# Altium PCB Board.PcbDoc
Units mm, origin at the board's own origin, x right, y up, seen from the top; angles counter-clockwise.
Board outline 80 x 50 mm, 4 copper layers (Top Layer, Internal Plane 1, Internal Plane 2, Bottom Layer), stack 0.462 mm thick; 27 components, 24 nets, 101 pads, 0 vias.
Unrouted connection lines stored in the file: 47.
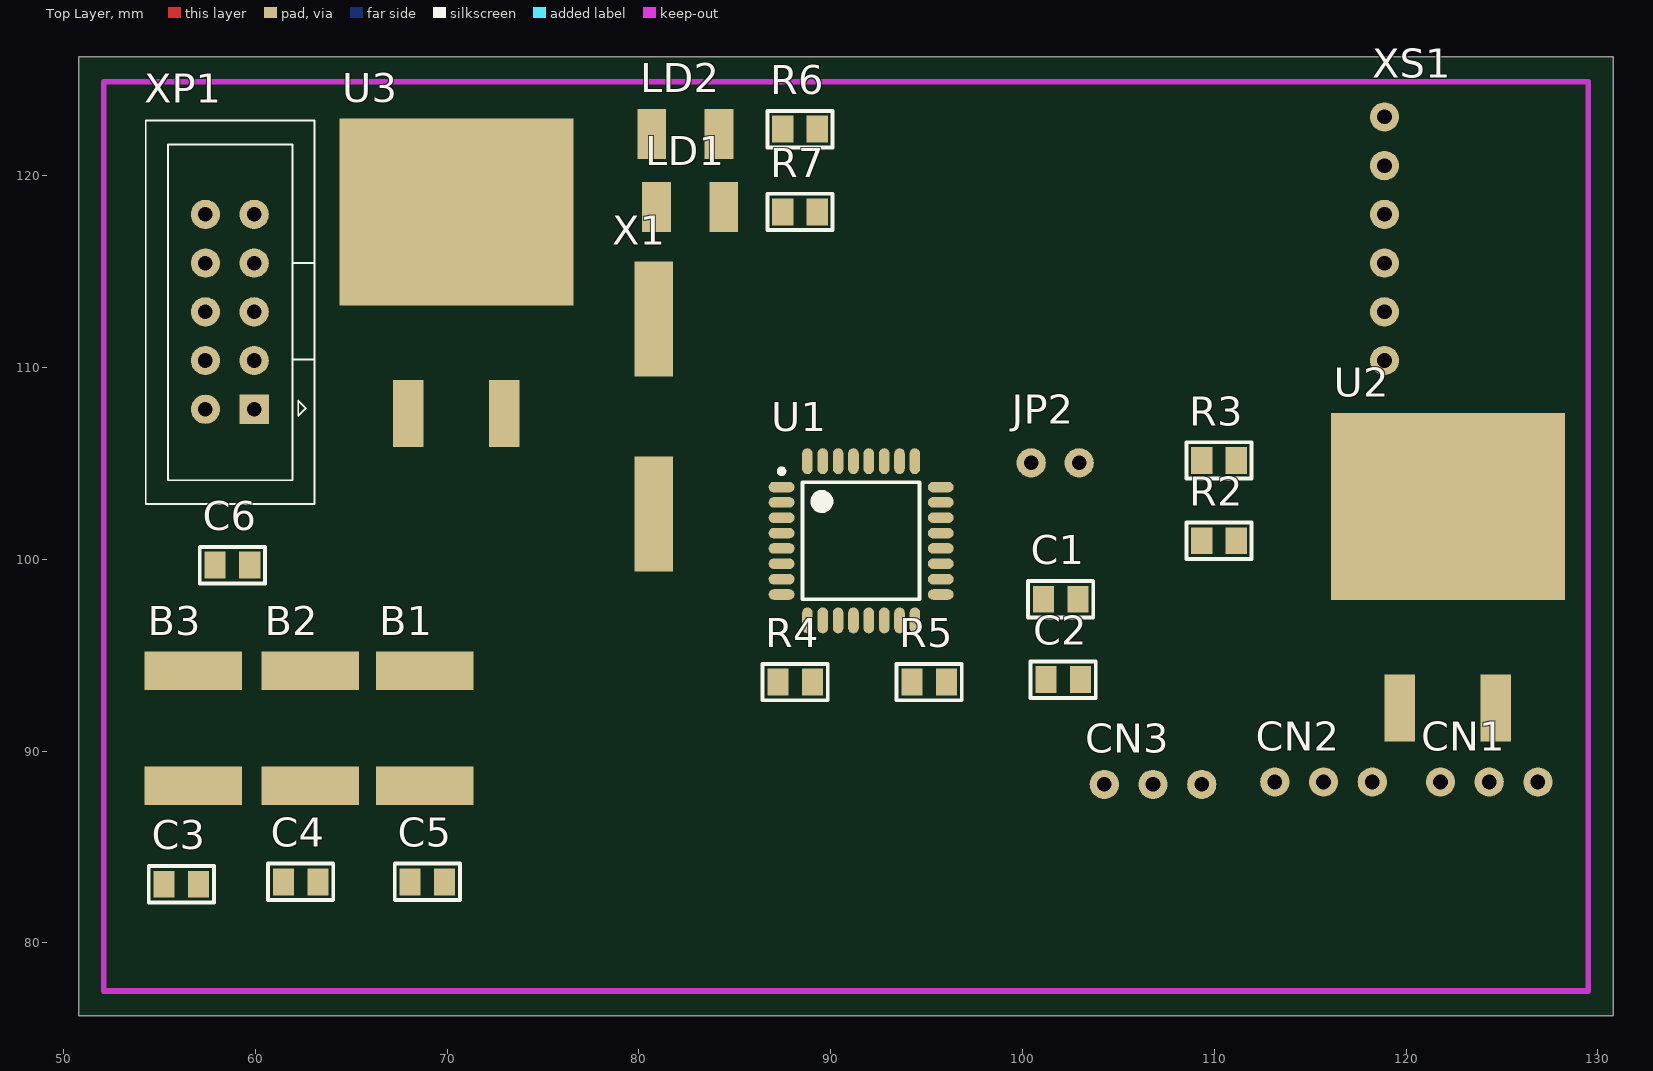
[diagram p0: Top Layer view]
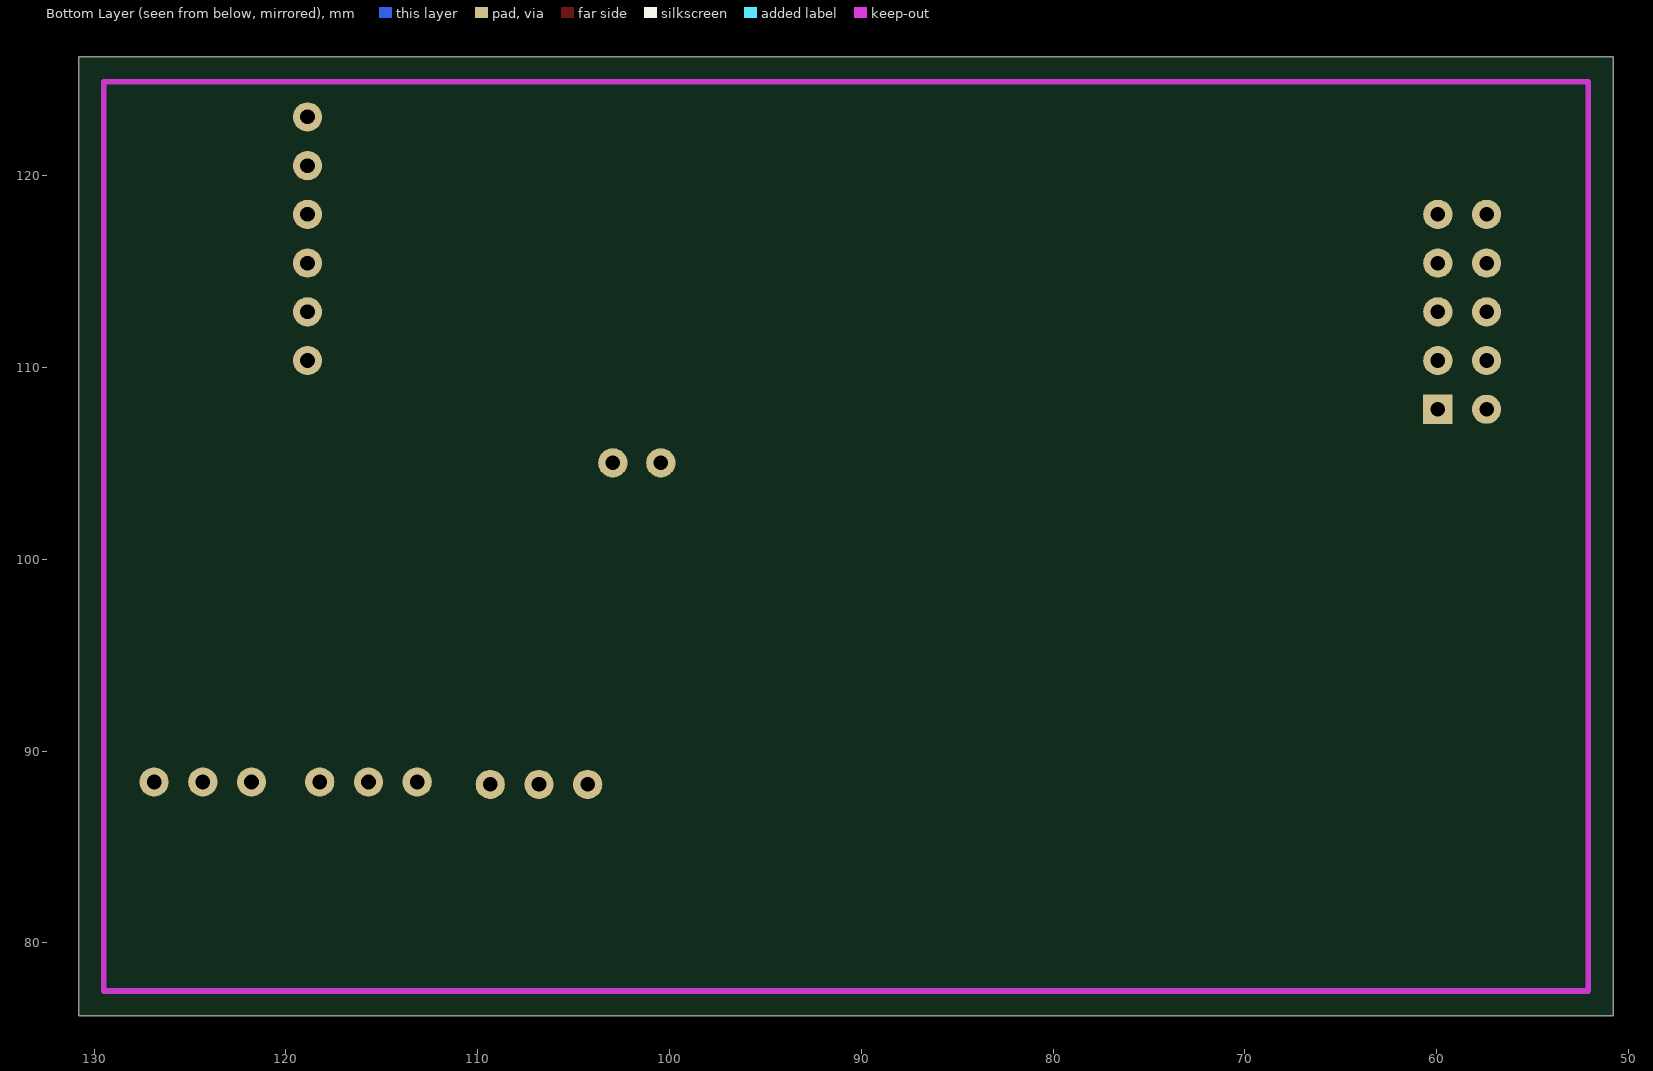
[diagram p1: Bottom Layer view, seen from below]
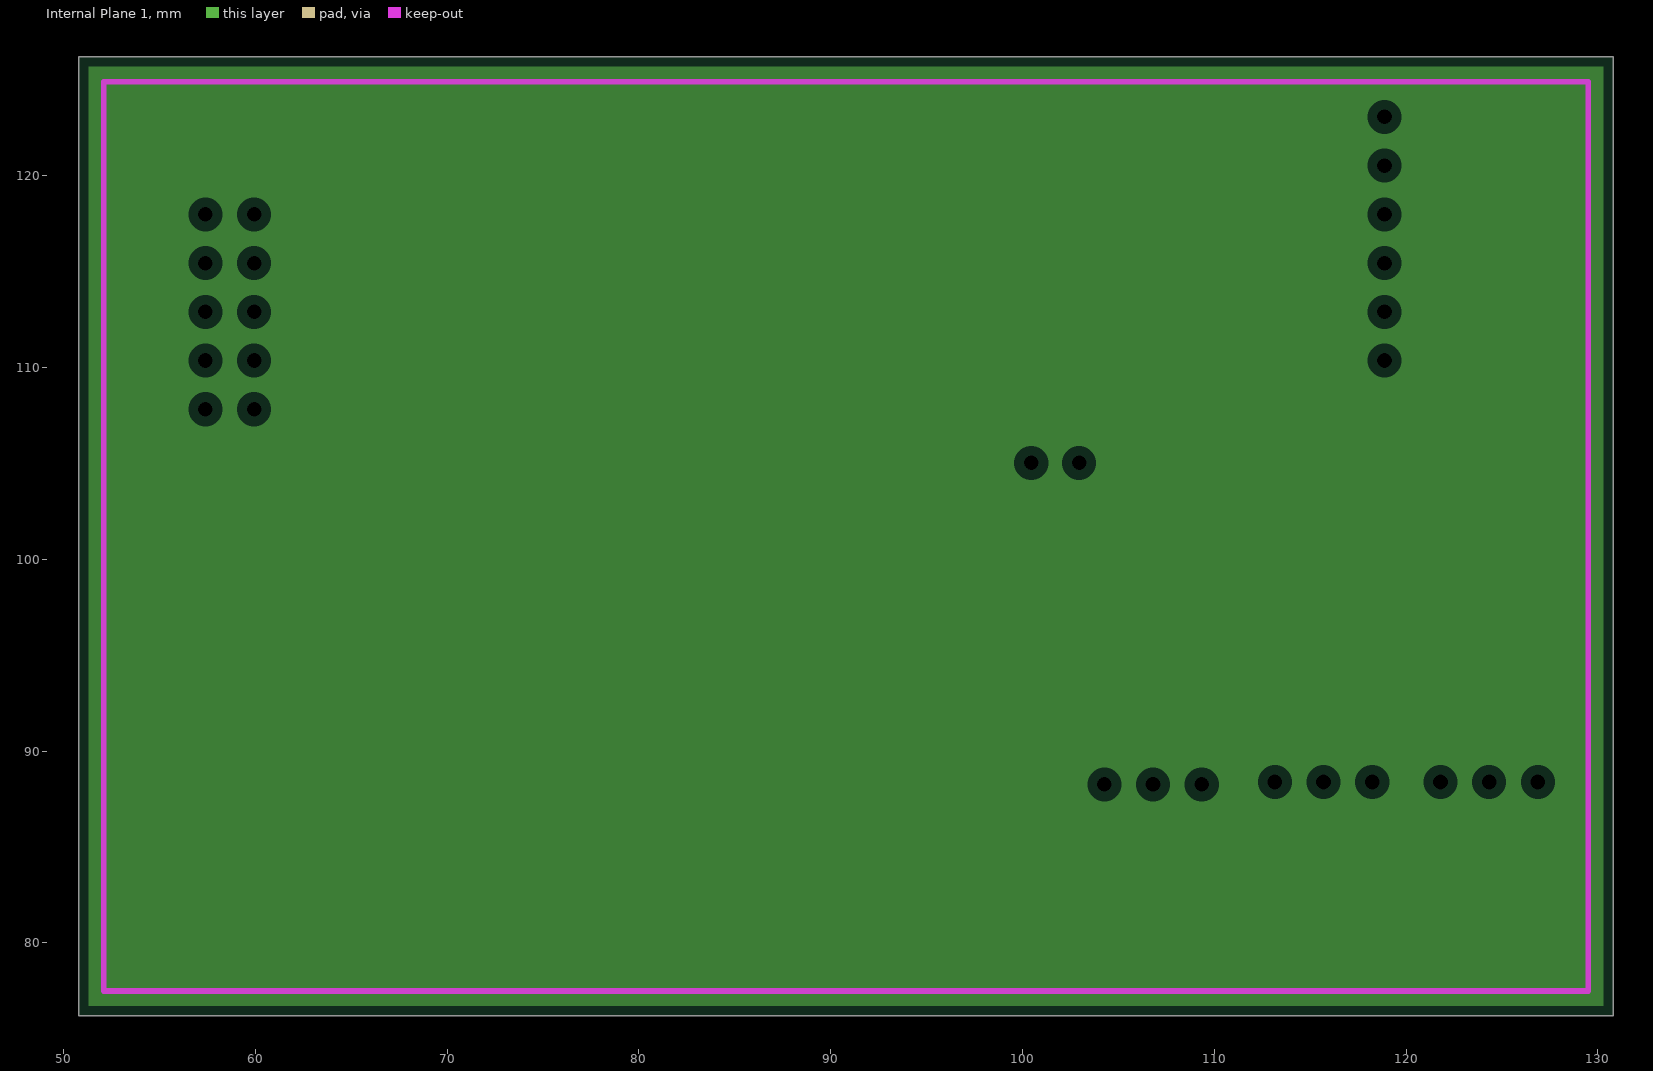
[diagram p2: Internal Plane 1, clearances drawn from the general rule]
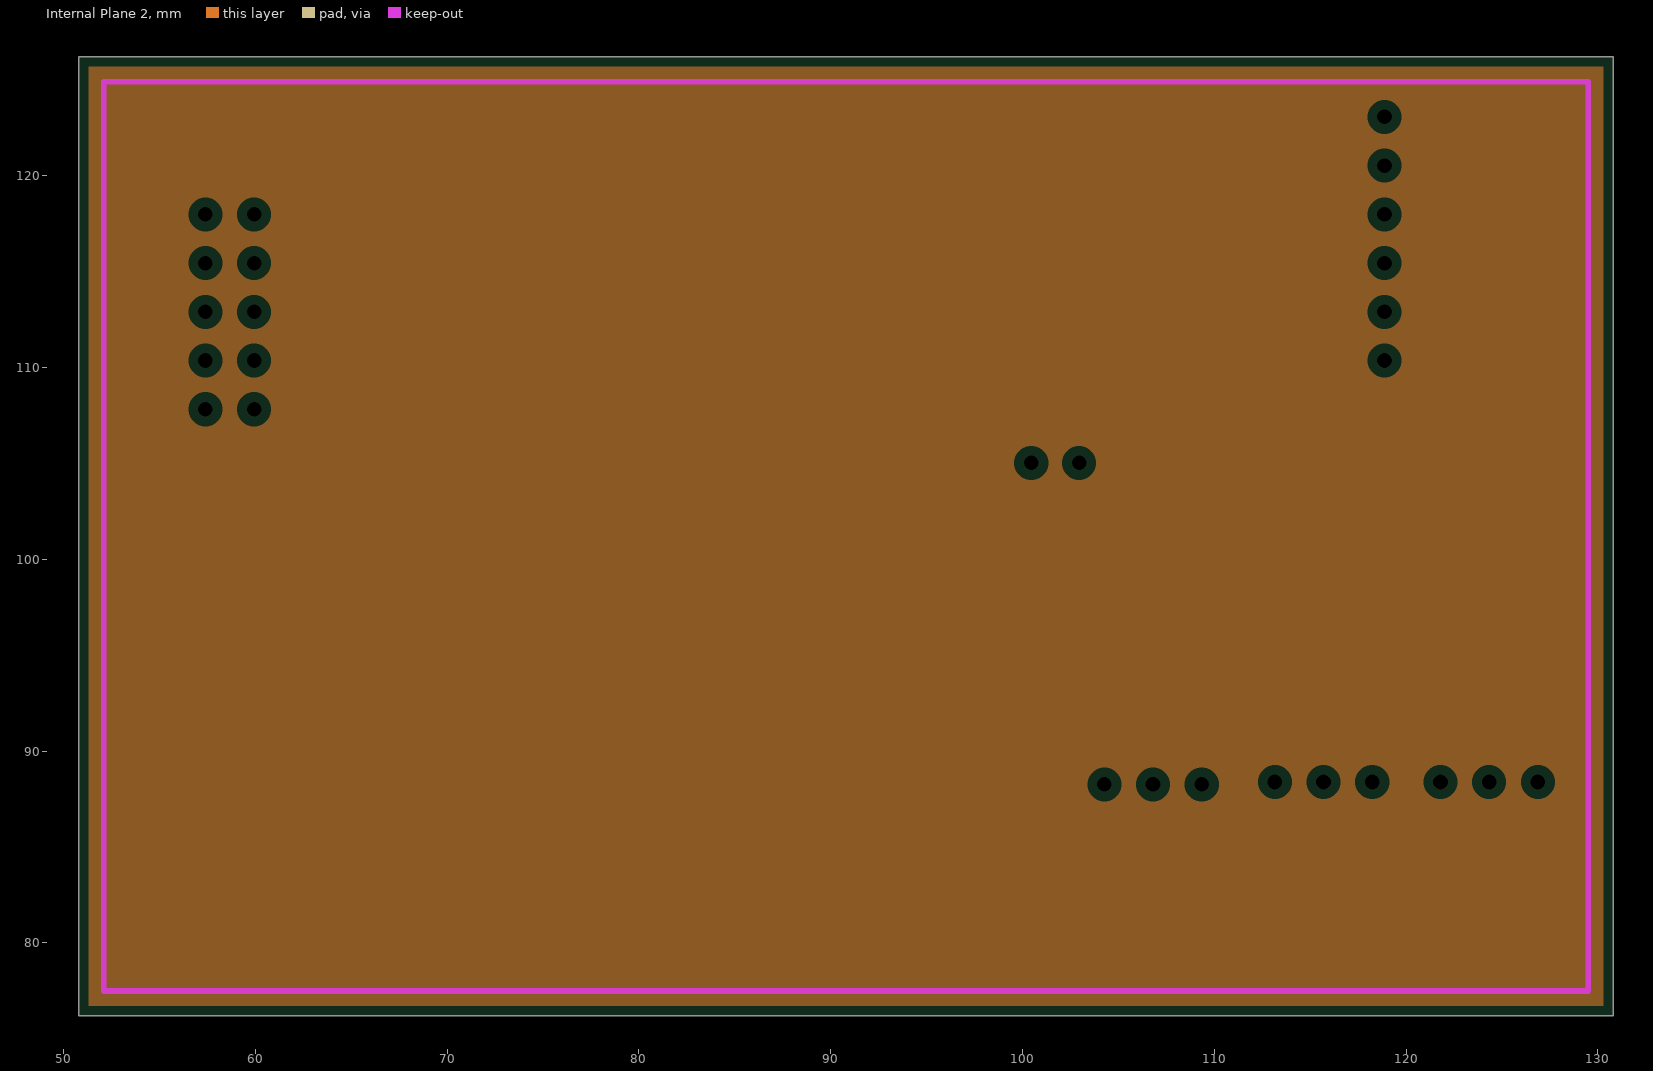
[diagram p3: Internal Plane 2, clearances drawn from the general rule]

## Layer stack, top to bottom
Top Solder: solder mask 0.0102, Solder Resist, Dk 3.5
Top Layer: signal copper 0.0356
Internal Plane 1: plane copper 0.0356
Internal Plane 2: plane copper 0.0356
Dielectric 1: dielectric 0.32, FR-4, Dk 4.8
Bottom Layer: signal copper 0.0356
Bottom Solder: solder mask 0.0102, Solder Resist, Dk 3.5

## Board outline
50.8,76.2 130.8,76.2 130.8,126.2 50.8,126.2

## Design rules (kind name [scope] priority, off if disabled: settings)
Clearance [All] p1: gap=0.2
PlaneClearance [All] p1: clearance=0.508
PlaneConnect [All] p1: planeconnectstyle=Relief reliefexpansion=0.508 reliefentries=4 reliefconductorwidth=0.254 reliefairgap=0.254
PolygonConnect [All] p1: connectstyle=Relief reliefconductorwidth=0.254 reliefentries=4 polygonreliefangle="90 Angle" airgapwidth=0.254
RoutingVias [All] p1: holewidth=0.5 width=1 viastyle="Through Hole" minholewidth=0.711 minwidth=1.27 maxholewidth=0.711 maxwidth=1.27
SolderMaskExpansion [All] p1: expansion=0.102
Width [All] p1: maxlimit=0.2 minlimit=0.2 preferedwidth=0.2
28 further rules are at their usual default settings.

## Components (designator, comment, footprint, x,y, rotation, side; value= is the part's Value field where it differs from the comment)
B1 "Button" "Button 5x5" 68.834,91.186 r90 top
B2 "Button" "Button 5x5" 62.865,91.186 r90 top
B3 "Button" "Button 5x5" 56.769,91.186 r90 top
C1 "С0805" 0805 101.092,97.917 r0 top
C2 "С0805" 0805 101.219,93.726 r0 top
C3 "С0805" 0805 55.245,83.058 r0 top
C4 "С0805" 0805 61.468,83.185 r0 top
C5 "С0805" 0805 68.072,83.185 r0 top
C6 "С0805" 0805 57.912,99.695 r0 top
CN1 "Servo" "DS1022 1x3" 121.793,88.392 r0 top
CN2 "Servo" "DS1022 1x3" 113.157,88.392 r0 top
CN3 "Servo" "DS1022 1x3" 104.267,88.265 r0 top
JP2 "Jumper" Jumper 100.457,105.029 r0 top
LD1 "LED" LED 82.677,118.364 r0 top
LD2 "LED" LED 82.423,122.174 r0 top
R2 "R0805" 0805 109.347,100.965 r0 top
R3 "R0805" 0805 109.347,105.156 r0 top
R4 "R0805" 0805 87.249,93.599 r0 top
R5 "R0805" 0805 94.234,93.599 r0 top
R6 "R0805" 0805 87.503,122.428 r0 top
R7 "R0805" 0805 87.503,118.11 r0 top
U1 "ATmega8" ATmega8 87.503,103.759 r0 top
U2 "7805 SMD" "7805 SMD" 122.174,102.743 r0 top
U3 "7805 SMD" "7805 SMD" 70.485,118.11 r0 top
X1 "XTAL" HC-49SM 80.772,102.362 r90 top
XP1 "Вилка ВН-10" "Вилка ВН-10" 59.944,107.823 r90 top
XS1 "MG-10-222" "DS1022 1x6" 118.872,110.363 r90 top

## Footprints (in the part's own frame and the unit in brackets; to place one, negate y for a bottom-side part, rotate by r counter-clockwise, add the part's x,y. Pads: shape width x height; smd on the part's side, far side on the other; paste and mask are expansions set on the pad)
0805 [mm]
  rect 1.1x1.4 smd: 1(0,0) 2(1.8,0)
  silkscreen extent -0.8,-0.95 2.6,0.95, body extent -0.4,-0.68 2.2,0.68, height 0.9
"7805 SMD" [mm]
  rect 1.6x3.5 smd: 1(-2.5,-10.5) 3(2.5,-10.5)
  rect 12.2x9.75 smd: 2(0,0)
  body extent -5.28,-11.65 5.36,4.2, height 4.8
ATmega8 [mm]
  oval 1.35x0.55 smd: 1(-0.063,0.006) 2(-0.063,-0.794) 3(-0.063,-1.594) 4(-0.063,-2.394) 5(-0.063,-3.194) 6(-0.063,-3.994) 7(-0.063,-4.794) 8(-0.063,-5.594) 17(8.237,-5.594) 18(8.237,-4.794) 19(8.237,-3.994) 20(8.237,-3.194) 21(8.237,-2.394) 22(8.237,-1.594) 23(8.237,-0.794) 24(8.237,0.006)
  oval 0.55x1.35 smd: 9(1.287,-6.944) 10(2.087,-6.944) 11(2.887,-6.944) 12(3.687,-6.944) 13(4.487,-6.944) 14(5.287,-6.944) 15(6.087,-6.944) 16(6.887,-6.944) 25(6.887,1.356) 26(6.087,1.356) 27(5.287,1.356) 28(4.487,1.356) 29(3.687,1.356) 30(2.887,1.356) 31(2.087,1.356) 32(1.287,1.356)
  silkscreen extent -0.19,-5.84 7.14,0.96, body extent -0.41,-7.29 8.59,1.71, height 1.08
"Button 5x5" [mm]
  rect 2x5.08 smd: 1(-3,0) 2(3,0)
  body extent -3.25,-2.54 3.25,2.54, height 1.52
"DS1022 1x3" [mil]
  round 60 hole 30: 1(0,0) 2(100,0) 3(200,0)
  body extent -50,-395 250,13, height 98
"DS1022 1x6" [mil]
  round 60 hole 30: 0(0,0) 1(100,0) 2(200,0) 3(300,0) 4(400,0) 5(500,0)
  body extent -50,-397 550,11, height 98
HC-49SM [mm]
  rect 6x2 smd: 1(0,0) 2(10.16,0)
  body extent -1.62,-2.4 11.78,2.4, height 4
Jumper [mil]
  round 60 hole 30: 1(0,0) 2(98.43,0)
  body extent -50,-50 150,50, height 339
LED [mm]
  rect 1.5x2.6 smd: 1(-1.75,0) 2(1.75,0)
  body extent -1.75,-1.4 1.75,1.4, height 0.95
"Вилка ВН-10" [mil]
  rect 60x60 hole 30: 1(0,0)
  round 60 hole 30: 2(0,100) 3(100,0) 4(100,100) 5(200,0) 6(200,100) 7(300,0) 8(300,100) 9(400,0) 10(400,100)
  silkscreen extent -195,-124 593,222, body extent -202,-127 600,235, height 348

## Nets (pads, with @x,y where several pads share a name; then routed paths per layer and width w, separated by ;. In a path a pad name is that pad's centre, name@x,y a point inside that pad or via, vN(x,y) a via of type N, cw(c..) or ccw(c..) an arc to the next point about the centre after c; other vN are vias at no path point)
+5-18V: 
GND: C1.1 C2.1 C3.1 C4.1 C5.1 C6.1 R2.2 R6.2 R7.2 XP1.4 XP1.6 XP1.8 XP1.10 XS1.2
MISO: U1.16 XP1.9
MOSI: U1.15 XP1.1
NetB1_1: B1.1 R3.2
NetB2_1: B2.1 R4.2
NetB3_1: B3.1 R5.2
NetC1_2: C1.2 U1.8 X1.2
NetC2_2: C2.2 U1.7 X1.1
NetC3_2: C3.2 C5.2
NetLD1_2: LD1.2 R7.1
NetLD2_2: LD2.2 R6.1
NetR2_1: R2.1 R3.1 R4.1 R5.1 U1.23
NetU1_3: U1.3 U1.5
NetU1_30: U1.30 XS1.3
NetU1_31: U1.31 XS1.4
PWM1: CN1.1 U1.12
PWM2: CN2.1 U1.13
PWM3: CN3.1 U1.14
RES: XP1.5
RESET: U1.29
SCK: U1.17 XP1.7
VS: C4.2 CN1.2 CN2.2 CN3.2 JP2.2 LD2.1
VSS: C6.2 JP2.1 LD1.1 U1.4 U1.6 XP1.2 XS1.1
pads on no net: B1.2 B2.2 B3.2 CN1.3 CN2.3 CN3.3 U1.1 U1.2 U1.9 U1.10 U1.11 U1.18 U1.19 U1.20 U1.21 U1.22 U1.24 U1.25 U1.26 U1.27 U1.28 U1.32 U2.1 U2.2 U2.3 U3.1 U3.2 U3.3 XP1.3 XS1.0 XS1.5

## Keep-outs
Keep-Out Layer:
  lines w0.3: 52.1,77.5 52.1,124.9 129.5,124.9 129.5,77.5 52.1,77.5